# Altium PCB PCB1.PcbDoc
Units mm, origin at the board's own origin, x right, y up, seen from the top; angles counter-clockwise.
Board outline 68.4 x 54.5 mm, 2 copper layers (Top Layer, Bottom Layer), stack 1.1 mm thick; 19 components, 22 nets, 74 pads, 4 vias.
Unrouted connection lines stored in the file: 1.
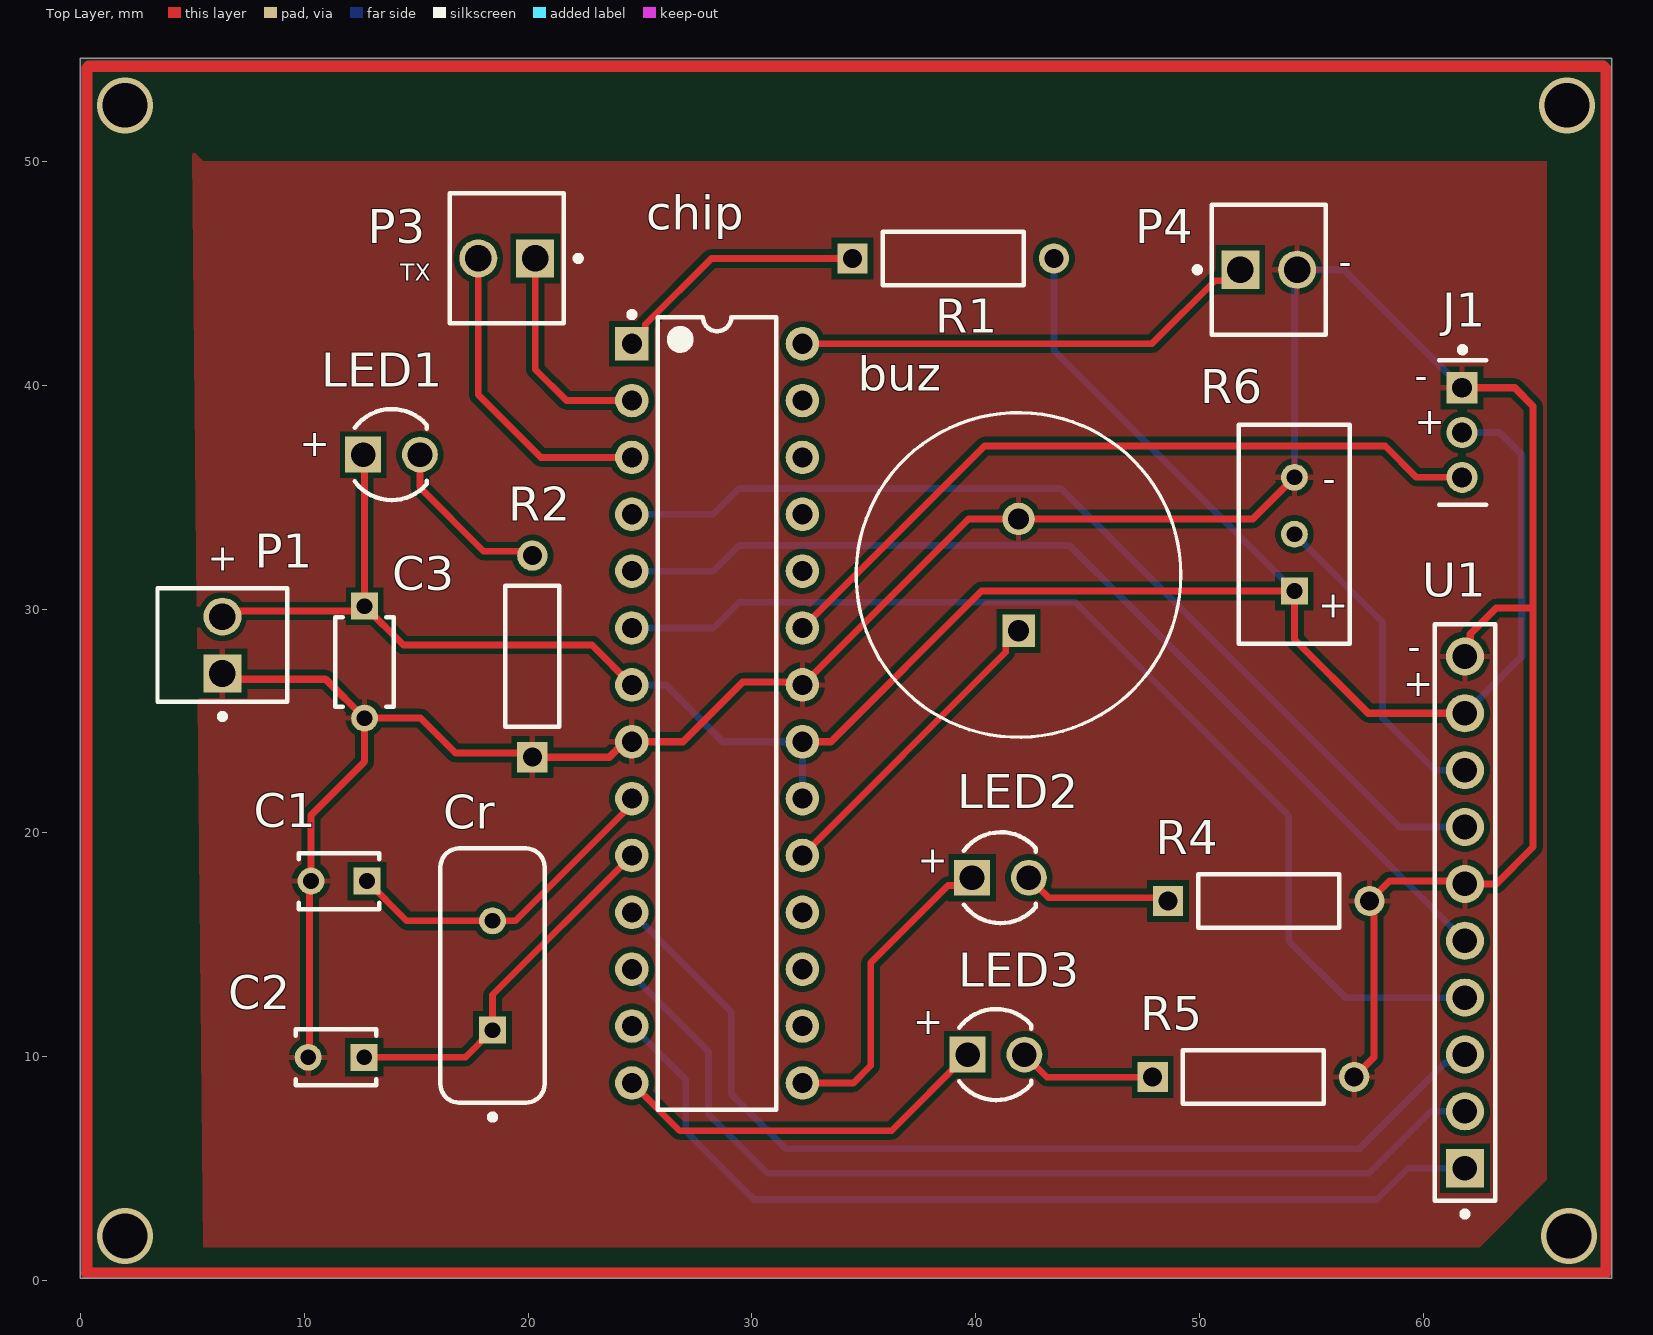
[diagram p0: Top Layer view]
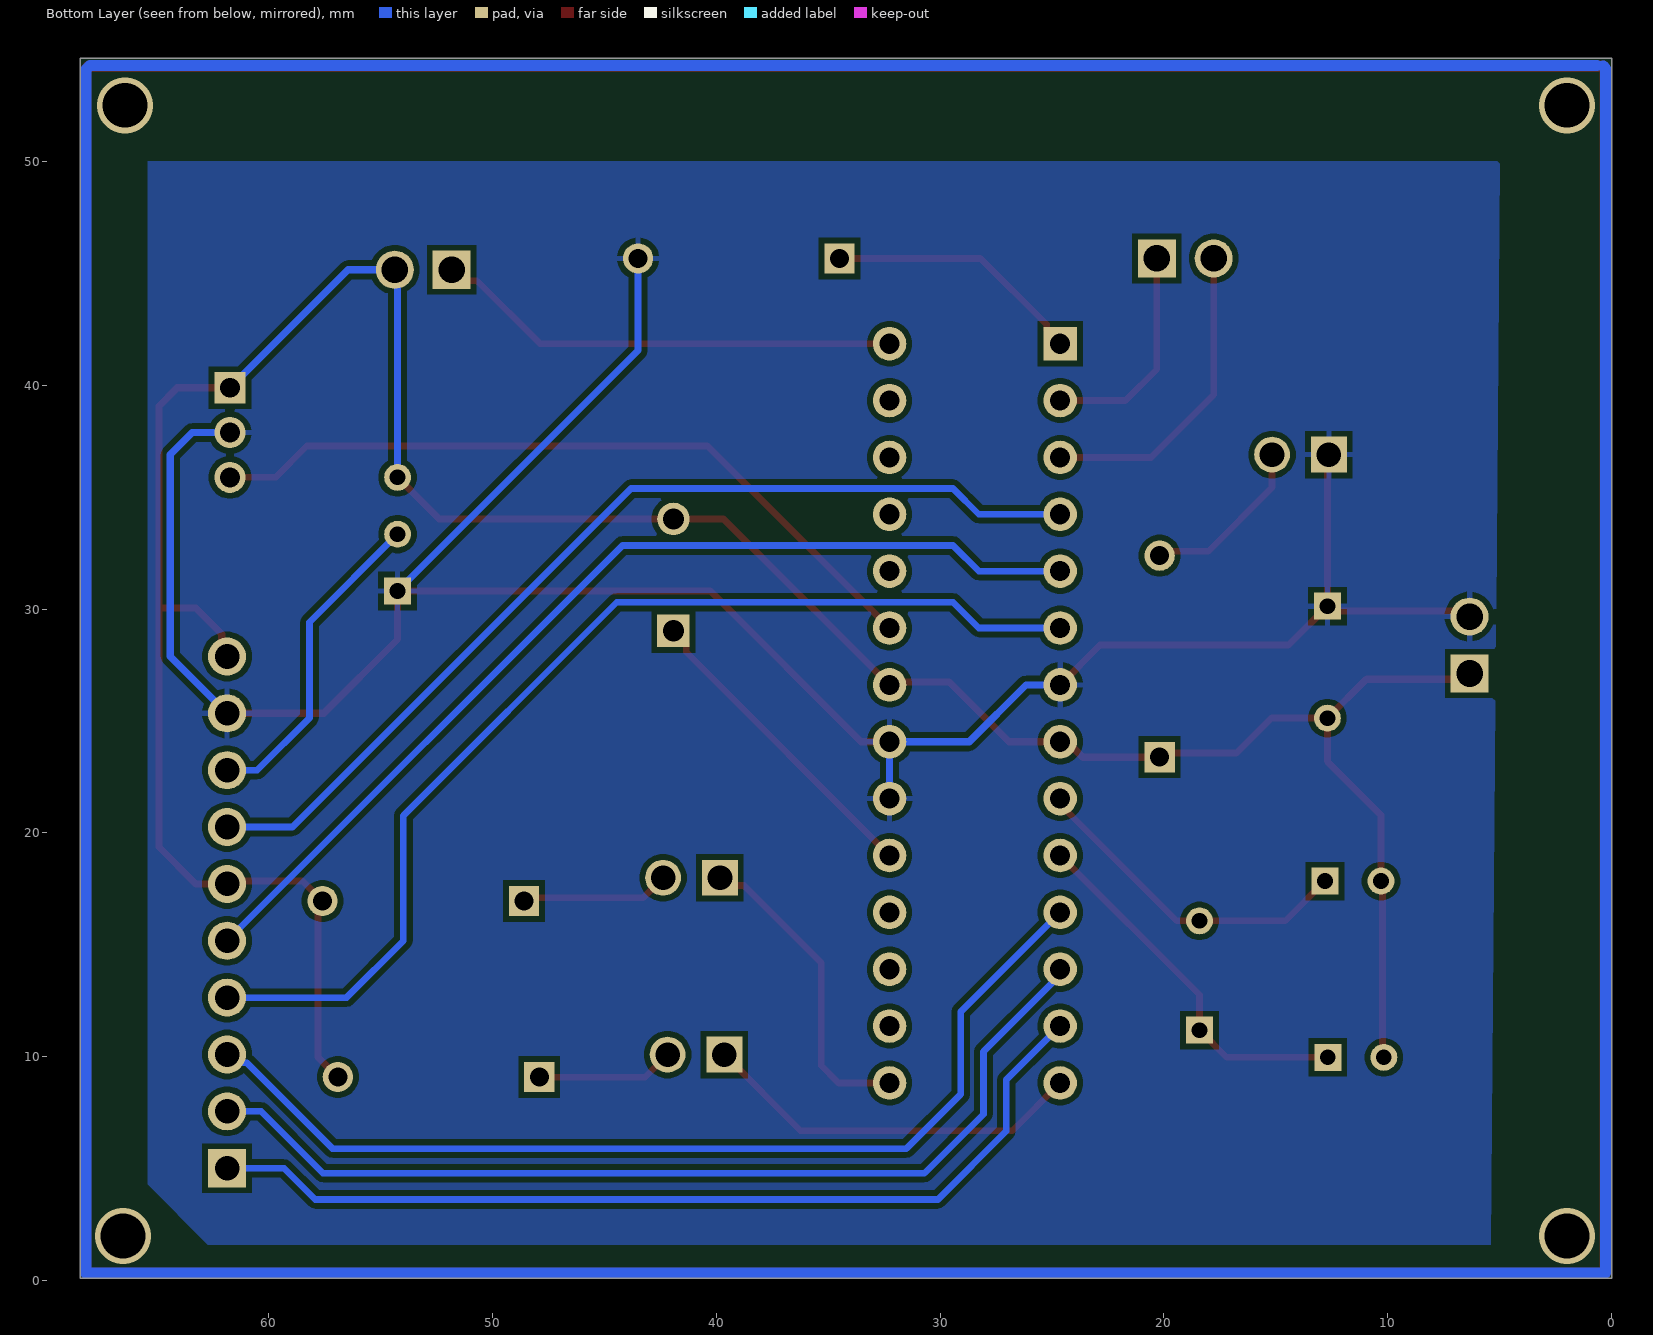
[diagram p1: Bottom Layer view, seen from below]
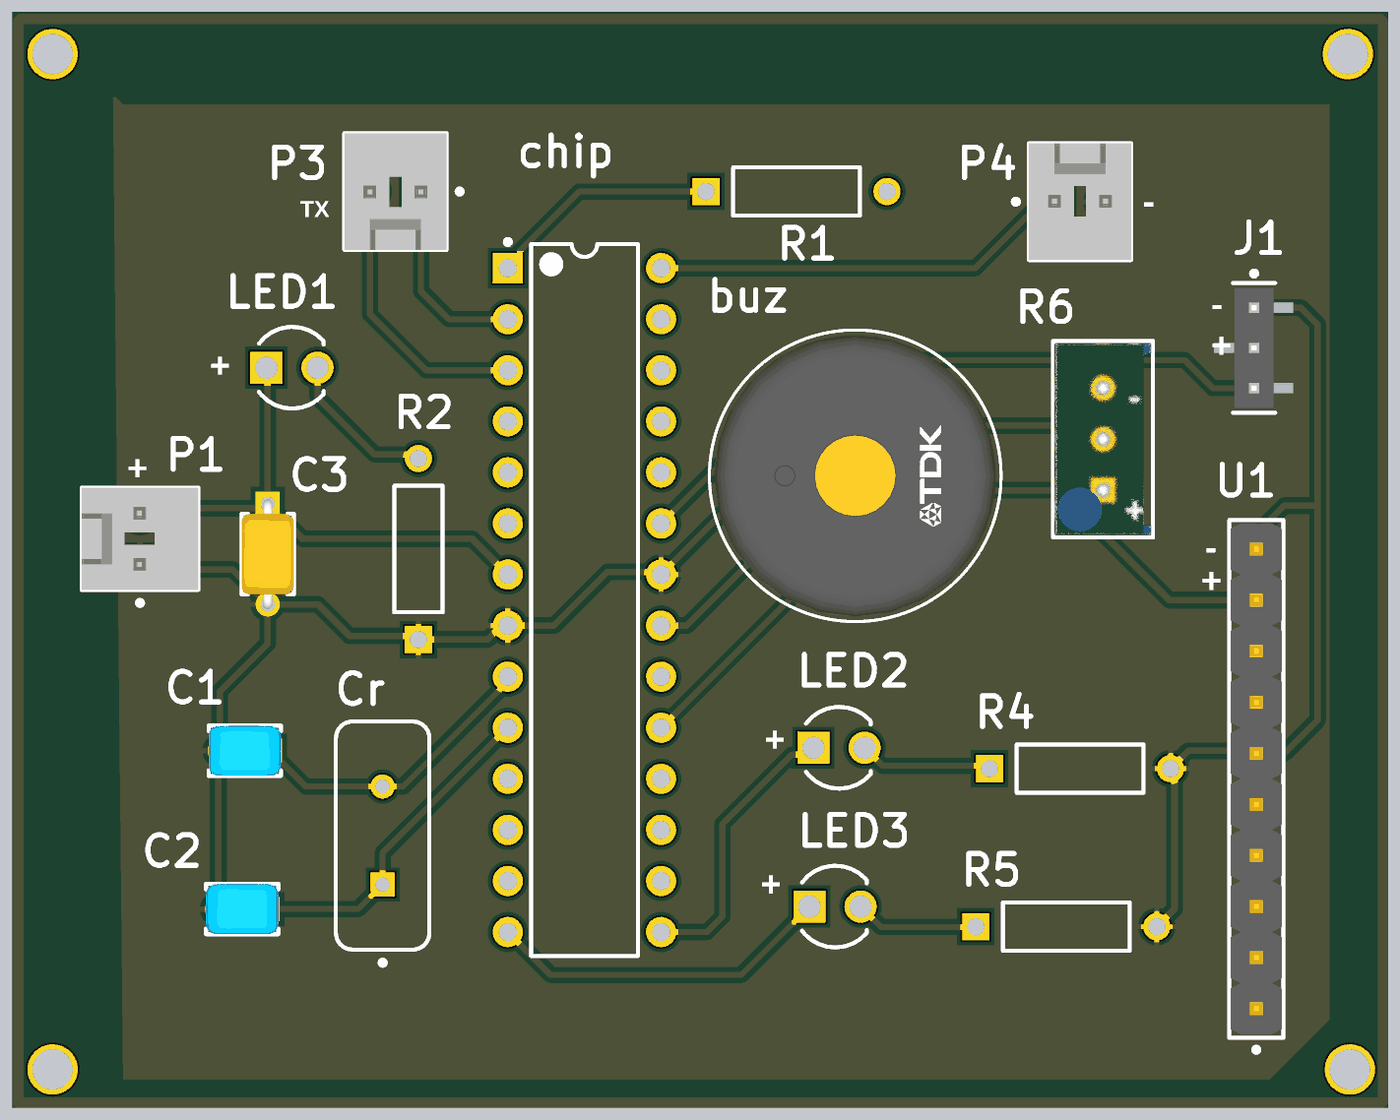
[diagram p2: 3D render of the assembled board from above, using the file's embedded part models]

## Layer stack, top to bottom
Top Solder: solder mask 0.05, SM-001, Dk 4
Top Layer: signal copper 0.1
Dielectric 1: dielectric 0.9, FR-4, Dk 4.8
Bottom Layer: signal copper 0.1
Bottom Solder: solder mask 0.05, SM-001, Dk 4

## Board outline
0,0.1 68.4,0.1 68.4,54.6 0,54.6

## Design rules (kind name [scope] priority, off if disabled: settings)
Clearance [All] p1: gap=0.25 ignorepadtopadclearanceinfootprint=FALSE
PolygonConnect [All] p1: connectstyle=Relief reliefconductorwidth=0.254 reliefentries=4 polygonreliefangle="90 Angle" airgapwidth=0.254
RoutingVias [All] p1: holewidth=0.6 width=0.7 viastyle="Through Hole" minholewidth=0.6 minwidth=0.7 maxholewidth=0.6 maxwidth=0.7
SolderMaskExpansion [All] p1: expansion=0.102 istentingtop=FALSE
Width WidthPWR [(InNet('VCC') OR InNet('GND'))] p1: maxlimit=0.32 minlimit=0.3 preferedwidth=0.32
Width [All] p2: maxlimit=0.5 minlimit=0.254 preferedwidth=0.3
30 further rules are at their usual default settings.

## Components (designator, comment, footprint, x,y, rotation, side; value= is the part's Value field where it differs from the comment)
buz "PS1440P02BT" FP-PS1440P02BT-MFG 41.906,31.527 r90 top
C1 "RCE5C2A220J0DBH03A" FP-RCE0DB-MFG 11.553,17.851 r180 top
C2 "RCE5C2A220J0DBH03A" FP-RCE0DB-MFG 11.426,9.977 r180 top
C3 "K104K15X7RF53H5" FP-K15H5-MFG 12.696,27.63 r270 top
chip "ATmega328P-PU" 28P3 28.444,25.344 r0 top
Cr "FOXSLF/160-20" FOX-FOXSLF160-20 18.411,13.633 r90 top
J1 "TMM-103-03-T-S" FP-TMM-103-03-T-S-MFG 61.738,37.885 r270 top
LED1 "HLMP-1790" LED-2P-2.54-3MM_V 13.9,36.9 r0 top
LED2 "HLMP-1790" LED-2P-2.54-3MM_V 41.1,18 r0 top
LED3 "HLMP-1790" LED-2P-2.54-3MM_V 40.9,10.1 r0 top
P1 "22-27-2021" MOLX-22-27-2021_V 6.346,28.392 r90 top
P3 "22-27-2021" MOLX-22-27-2021_V 19.046,45.664 r180 top
P4 "22-27-2021" MOLX-22-27-2021_V 53.082,45.156 r0 top
R1 "MFR-25FBF5210K" RESA60-630X240 38.985,45.664 r0 top
R2 "MFR-25FBF5210K" RESA60-630X240 20.189,27.884 r90 top
R4 "MFR-25FBF52-1K" RESA60-630X240 53.082,16.962 r0 top
R5 "MFR-25FBF52-1K" RESA60-630X240 52.4,9.1 r0 top
R6 "3296W-1-202LF" FP-3296W-MFG 54.225,33.345 r0 top
U1 "61301011121" FP-61301011121-MFG 61.845,16.454 r90 top

## Footprints (in the part's own frame and the unit in brackets; to place one, negate y for a bottom-side part, rotate by r counter-clockwise, add the part's x,y. Pads: shape width x height; smd on the part's side, far side on the other; paste and mask are expansions set on the pad)
28P3 [mm] "28-Pin Plastic Dual In-Line Package (PDIP)"
  rect 1.5x1.5 hole 0.9: 1(-3.81,16.51)
  round 1.5 hole 0.9: 2(-3.81,13.97) 3(-3.81,11.43) 4(-3.81,8.89) 5(-3.81,6.35) 6(-3.81,3.81) 7(-3.81,1.27) 8(-3.81,-1.27) 9(-3.81,-3.81) 10(-3.81,-6.35) 11(-3.81,-8.89) 12(-3.81,-11.43) 13(-3.81,-13.97) 14(-3.81,-16.51) 15(3.81,-16.51) 16(3.81,-13.97) 17(3.81,-11.43) 18(3.81,-8.89) 19(3.81,-6.35) 20(3.81,-3.81) 21(3.81,-1.27) 22(3.81,1.27) 23(3.81,3.81) 24(3.81,6.35) 25(3.81,8.89) 26(3.81,11.43) 27(3.81,13.97) 28(3.81,16.51)
  silkscreen extent -3.93,-17.7 2.65,17.93, body extent -3.6,-17.65 3.6,17.65, height 4.58
FOX-FOXSLF160-20 [mm] "THD, 2-Leads, Body 11.35x4.65mm"
  rect 1.2x1.2 hole 0.7: 1(-2.44,0)
  round 1.2 hole 0.7: 2(2.44,0)
  silkscreen extent -6.45,-2.33 5.68,2.33, body extent -5.67,-2.32 5.68,2.33, height 3.6
FP-3296W-MFG [mm]
  rect 1.2x1.2 hole 0.7 paste-1000 mask+0: 1(0.005,-2.54)
  round 1.2 hole 0.7 paste-1000 mask+0: 2(0.005,0) 3(0.005,2.54)
  silkscreen extent -2.48,-4.89 2.48,4.89, body extent -2.58,-4.99 2.58,4.99, height 0.25
FP-61301011121-MFG [mm]
  rect 1.7x1.7 hole 1.1 paste-1000 mask+0: 1(-11.43,0)
  round 1.7 hole 1.1 paste-1000 mask+0: 2(-8.89,0) 3(-6.35,0) 4(-3.81,0) 5(-1.27,0) 6(1.27,0) 7(3.81,0) 8(6.35,0) 9(8.89,0) 10(11.43,0)
  silkscreen extent -13.6,-1.34 12.88,1.34, body extent -12.98,-1.45 12.98,1.45, height 0.25
FP-K15H5-MFG [mm]
  rect 1.2x1.2 hole 0.7 paste-1000 mask+0: 1(-2.5,0)
  round 1.2 hole 0.7 paste-1000 mask+0: 2(2.5,0)
  silkscreen extent -2,-1.3 2,1.3, body extent -3.2,-1.4 3.2,1.4, height 0.25
FP-PS1440P02BT-MFG [mm]
  rect 1.45x1.45 hole 0.95 paste-1000 mask+0: 1(-2.5,0)
  round 1.45 hole 0.95 paste-1000 mask+0: 2(2.5,0)
  silkscreen extent -7.25,-7.25 7.25,7.25, body extent -7.35,-7.35 7.35,7.35, height 0.25
FP-RCE0DB-MFG [mm]
  rect 1.2x1.2 hole 0.7 paste-1000 mask+0: 1(-1.25,0)
  round 1.2 hole 0.7 paste-1000 mask+0: 2(1.25,0)
  silkscreen extent -1.8,-1.25 1.8,1.25, body extent -1.95,-1.35 1.95,1.35, height 0.25
FP-TMM-103-03-T-S-MFG [mm]
  rect 1.39x1.39 hole 0.89 paste-1000 mask+0: 1(-2,-0.02)
  round 1.39 hole 0.89 paste-1000 mask+0: 2(0,-0.02) 3(2,-0.02)
  silkscreen extent -3.82,-1.05 3.22,1.05, body extent -3.1,-2.07 3.1,2.07, height 0.25
LED-2P-2.54-3MM_V [mm] "LED, 2-Leads, Dia 3mm, Pitch 2.54mm"
  rect 1.6x1.6 hole 1.1: 1(-1.27,0)
  round 1.6 hole 1.1: 2(1.27,0)
  silkscreen extent -1.64,-2.03 1.57,2.03, body extent -2.06,-2.07 1.6,2.07, height 6.35
MOLX-22-27-2021_V [mm] "Header, 2-Leads, Body 5.8x5.08mm"
  rect 1.7x1.7 hole 1.19: 1(-1.27,0)
  round 1.7 hole 1.19: 2(1.27,0)
  silkscreen extent -3.31,-2.9 2.54,2.9, body extent -2.54,-2.9 2.54,2.9, height 11.72
RESA60-630X240 [mm] "Axial Resistor, 2-Leads, Dia 2.4mm, Body Length 6.3mm"
  rect 1.35x1.35 hole 0.85: 1(-4.5,0)
  round 1.35 hole 0.85: 2(4.5,0)
  silkscreen extent -3.15,-1.2 3.15,1.2, body extent -3.15,-1.2 3.15,1.2, height 2.4

## Part data
buz: library part CMP-08413-000003-1, "AUDIO PIEZO TRANSDUCER 30V TH", Frequency=4kHz, Max Operating Temperature=70°C, Min Operating Temperature=-10°C, Operating Supply Voltage=3V, Package Quantity=350, Diameter=14mm, Height=8mm, Lead Free="Lead Free", Mount="Through Hole", Number of Terminals/Pins=2, Packaging="Tape and Reel", RoHS Compliant=Yes, Self Resonant Frequency=4kHz, Termination="PC Pins", Voltage Rating (DC)=3V, Washable=No
C1 C2: library part CMP-06035-047347-1, "Cap Ceramic 22pF 100V C0G ±5% Radial 2.5mm +125°C Ammo Pack", Capacitance=22pF, Case/Package=Radial, Dielectric=C0G, Max Operating Temperature=125°C, Min Operating Temperature=-55°C, Package Quantity=2000, Ratings=AEC-Q200, Resistor Type=Ceramic, Tolerance=5%, Voltage=100V, Depth=2.5mm, Height=3.5mm, Height - Seated (Max)=0.138inch, Lead Diameter=0.5mm, Lead Pitch=0.098inch, Lead/Base Style=Straight, Length=3.6mm, Mount="Through Hole", Packaging="Tape and Reel", Termination=Radial, Voltage Rating=100V, Voltage Rating (DC)=100V, Width=0.098inch
C3: library part CMP-02417-000048-1, "CAP CER 0.1UF 50V X7R RADIAL", Capacitance=100nF, Case/Package=Dipped, Dielectric=X7R, Max Operating Temperature=125°C, Min Operating Temperature=-55°C, Package Quantity=5000, Tolerance=10%, Voltage=50V, Construction=RADIAL, Depth=2.5mm, Diameter=500um, Height=4mm, Height - Seated (Max)=0.1inch, Lead Diameter=0.5mm, Lead Length=30mm, Lead Pitch=5mm, Lead/Base Style="Formed Leads", Length=4mm, Mount="Through Hole", Packaging=Bulk, Radiation Hardening=No, RoHS Compliant=Yes, Series=K, Termination=Radial, Thickness=2.6mm, Voltage Rating=50V, Voltage Rating (DC)=50V, Weight=0.005644oz, Width=2.5mm
chip: library part CMP-0095-00013-2, "8-bit AVR Microcontroller, 32KB Flash, 1KB EEPROM, 2KB SRAM, 28-pin PDIP, Industrial Grade (-40°C to 85°C)", ComponentLink1Description="Manufacturer URL", ComponentLink1URL=http://www.atmel.com/, ComponentLink2Description="ATmega48A/48PA/88A/88PA/168A/168PA/328/328P Datasheet", ComponentLink2URL=http://www.atmel.com/dyn/resources/prod_documents/8271.pdf, ComponentLink3Description="ATmega48A/48PA/88A/88PA/168A/168PA/328/328P Summary", ComponentLink3URL=http://www.atmel.com/dyn/resources/prod_documents/8271S.pdf, DatasheetVersion="revD, May-2011", PackageDescription="28-lead (0.300\"/7.62mm Wide) Plastic Dual Inline Package (PDIP)", PackageReference=28P3, PackageVersion="revB, Sep-2001", RevisionNote="DatasheetVersion updated. URLs added."
Cr: library part CMP-1749-00003-1, "Resistance Weld Thru-Hole Crystal, 16 MHz, -20 to 70 degC, 2-Pin THD, RoHS, Bulk", Case\Package=Axial, Max Operating Temperature="155 degC", Min Operating Temperature="-55 degC", Package Quantity=200, Power Rating="250 mW", Resistance="221 kohm", Tolerance=1%, Voltage Rating="250 V", ComponentLink1Description="Manufacturer URL", ComponentLink1URL=http://www.foxonline.com/, ComponentLink2Description=Datasheet, ComponentLink2URL=http://www.foxonline.com/pdfs/hc49slf.pdf, DatasheetVersion=Mar-15, Length="0.248 inch", Mount="Through Hole", PackageDescription="2-Pin Through Hole Device, Body 11.35 x 4.65 mm", PackageReference=FOXSLF160-20, Packaging=Bulk, RoHSCompliant=true
J1: library part CMP-02766-001695-1, "CONN HEADER VERT 3POS 2MM", Color=Black, Max Current Rating=3.9A, Max Operating Temperature=105°C, Max Voltage Rating (AC)=500V, Min Operating Temperature=-55°C, Package Quantity=1, Connector Type=Header, Contact Finish - Mating=TIN, Contact material=Bronze, Contact Mating Length=0.157inch, Contact Plating=Tin, Contact Shape=Square, Contact Type="Male Pin", Depth=1.97mm, Fastening Type=Pull, Gender=Male, Housing Color=Black, Housing material=Polymer, Insulation Color=Black, Insulation Material=Polymer, Lead Free="Lead Free", Length=6mm, Mount="Through Hole", Number of Contacts=3, Number of Positions=3, Number of Rows=1, Orientation=Straight, Packaging=Bulk, Pitch=2mm, Radiation Hardening=No, REACH SVHC="No SVHC", RoHS Compliant=Yes, Series=TMM, Termination=Solder
LED1 LED2 LED3: library part CMP-2000-05186-1, "LED, Green, 2 mA, 1.9 V, -20 to 100 degC, 2-Pin THD, RoHS, Bulk", Color=Green, Dominant Wavelength/Color Temperature=569nm, Manufacturer=Avago, Package=2T-1, Category=LEDs, Datasheet URL=https://datasheet.ciiva.com/11773/0900766b800204ad-11773539.pdf, Datasheet Version=Jul-14, Intensity=2.3mcd, Lens Appearance=ColoredDiffused, Lens Shape Type=Circular, Manufacturer URL=http://www.avagotech.com/, Mounting=ThroughHole, Mounting Orientation=TopMount, Number of LEDs=1, Packaging=Bulk, Peak Wavelength=565nm, Pin Count=2, Rad Hard=No, Type=Uni-Color, Viewing Angle=50deg
P1 P3 P4: library part CMP-2000-05537-1, "Male Header, Pitch 2.54 mm, 1 x 2 Position, Height 11.7 mm, Tail Length 3.56 mm, 0 to 75 degC, RoHS, Bulk", Current - Max=4A, Manufacturer=Molex, Operating temperature=0°Cto+75°C, Package Description="2-Leads Header, Body 5.08 x 5.8 mm, Pitch 2.54 mm", Package Version="Rev. BC, 02/2012", PartNumber=0022272021, Voltage - Max=250V, Contact material=Tinplatedbrass, Current rating=4A, Datasheet URL=http://www.molex.com/pdm_docs/sd/022272021_sd.pdf, Datasheet Version="Rev. F, 06/2009", Housing material=Nylon(UL94V-0), Manufacturer URL=http://www.molex.com/, Mounting Technology=ThroughHole, No. of Positions=2, No. of Rows=1, Orientation=Vertical, Package Reference=22-27-2021, Pitch=2.54mm, Voltage Rating=250V
R1 R2: library part CMP-1659-00074-2, "Axial Resistor, 10 KOhm, +/- 1%, 0.25 W, -55 to 155 degC, 2-Pin THD, RoHS, Bulk", Case\/Package=Axial, Manufacturer=Yageo, Max Operating Temperature=155degC, Max Power Dissipation=250mW, Min Operating Temperature=-55degC, Package Description="2-Pin Axial Lead, Dia 2.4 mm, Body Length 6.3 mm", Package Quantity=200, Package Reference=MFR-25, Resistance=10KOhm, Temperature Coefficient=100ppm\/degreesC, Tolerance=1%, Voltage Rating=250V, Voltage Rating (DC)=200V, Composition=MetalFilm, Datasheet URL=http://www.yageo.com/documents/recent/Yageo%20LR_MFR_2013.pdf, Datasheet Version=04/2013, Lead Free=LeadFree, Length=0.248inch, Manufacturer URL=http://www.yageo.com/, Military Standard=Not, Mount=ThroughHole, Mounting Technology=ThroughHole, Number of Terminations=2, Packaging=Bulk, Power Rating=250mW, RoHSCompliant=True, Termination=Axial
R4 R5: library part CMP-1659-00075-1, "Axial Resistor, 1 KOhm, +/- 1%, 250 mW, -55 to 155 degC, 2-Pin THD, RoHS, Bulk", Case\Package=Axial, Max Operating Temperature="155 degC", Min Operating Temperature="-55 degC", Package Quantity=200, Power Rating="250 mW", Resistance="100 ohm", Tolerance=1%, Voltage Rating="250 V", ComponentLink1Description="Manufacturer URL", ComponentLink1URL=http://www.yageo.com/, ComponentLink2Description=Datasheet, ComponentLink2URL=http://www.yageo.com/documents/recent/Yageo%20LR_MFR_2013.pdf, DatasheetVersion=Apr-13, Length="0.248 inch", PackageDescription="2-Pin Axial Lead, Dia 2.4 mm, Body Length 6.3 mm", PackageReference=MFR-25, Packaging=Bulk, RoHSCompliant=true
R6: library part CMP-2000-05582-2, "TRIMMER 2K OHM 0.5W PC PIN TOP", Color=Blue, Max Operating Temperature=125°C, Max Power Dissipation=500mW, Min Operating Temperature=-55°C, Package Quantity=50, Resistance=2kR, Resistance Tolerance=10%, Resistor Type=Cermet, Temperature Coefficient=100ppm/°C, Contact Plating=Tin, Depth=4.83mm, Height=0.395inch, Lead Free="Lead Free", Length=9.53mm, Military Standard=Not, Mount=Panel, Number of Turns=25, Packaging=Rail/Tube, Power Rating=500mW, Radiation Hardening=No, REACH SVHC="No SVHC", RoHS Compliant=Yes, Series=3296, Taper=Linear, Technology=CERMET, Termination=Pin, Tolerance=10%, Weight=0.03oz, Width=9.53mm
U1: library part CMP-1502-01082-3, "CONN HEADER VERT 10POS 2.54MM", Color=Black, Current rating=3A, Flammability Rating="UL94 V-0", Insulation Resistance=1GR, Max Operating Temperature=105°C, Min Operating Temperature=-40°C, Package Quantity=1000, Voltage Rating=250V, Connector Type=Header, Contact Finish - Mating=GOLD, Contact Gender=Male, Contact material="Copper Alloy", Contact Mating Length=0.236inch, Contact Plating=Gold, Contact Shape=Square, Contact Type="Male Pin", Fastening Type=Pull, Gender=Male, Height=11.54mm, Housing material=PBT, Insulation Color=Black, Insulation Material=Nylon, Length=2.54mm, Mount="Through Hole", Number of Contacts=10, Number of Positions=10, Number of Rows=1, Orientation=Straight, Packaging=Bulk, Pitch=2.54mm, RoHS Compliant=Yes, Series=WR-PHD, Termination=Solder, Width=25.4mm

## Via types
v1: diameter 2.5, hole 2, Top Layer to Bottom Layer, 4 vias

## Nets (pads, with @x,y where several pads share a name; then routed paths per layer and width w, separated by ;. In a path a pad name is that pad's centre, name@x,y a point inside that pad or via, vN(x,y) a via of type N, cw(c..) or ccw(c..) an arc to the next point about the centre after c; other vN are vias at no path point)
GND: buz.2 C1.2 C2.2 C3.2 chip.8 chip.22 J1.1 P1.1 P4.2 R2.1 R4.2 R5.2 R6.3 U1.6 U1.10 | length 134.5
  Top Layer w0.32: P1.1 6.6,26.868 10.958,26.868 C3.2 ; C2.2 10.24,10.041 10.24,17.788 C1.2 10.303,20.792 12.696,23.185 C3.2 ; R6.3 52.372,34.027 buz.2 39.667,34.027 chip.22 32.127,26.741 29.587,26.741 26.92,24.074 chip.8 24.315,24.074 23.625,23.384 R2.1 20.007,23.566 16.76,23.566 15.196,25.13 C3.2 ; P4.2@54.352,44.792 P4.2 ; R5.2 57.781,9.981 57.781,16.484 57.582,16.683 R4.2 58.471,17.851 61.718,17.851 U1.6 63.242,17.724 64.893,19.375 64.893,30.043 ; J1.1 64.068,39.885 64.893,39.06 64.893,30.043 ; U1.10 62.084,28.123 62.084,28.885 63.242,30.043 64.893,30.043
  Bottom Layer w0.32: R6.3 54.23,45.034 P4.2 56.447,45.156 J1.1
Netbuz_1: buz.1 chip.19 | length 14
  Top Layer w0.3: chip.19 41.331,28.071 41.331,28.452 buz.1
NetC1_1: C1.1 chip.9 Cr.2 | length 15
  Top Layer w0.3: C1.1 14.581,16.073 19.427,16.073 24.634,21.28 chip.9
NetC2_1: C2.1 chip.10 Cr.1 | length 16.6
  Top Layer w0.3: C2.1 17.195,9.977 Cr.1 18.411,12.771 chip.10
Netchip_1: chip.1 R1.1 | length 11.6
  Top Layer w0.3: chip.1 25.234,42.454 25.234,42.708 28.19,45.664 R1.1
Netchip_2: chip.2 P3.1 | length 9.8
  Top Layer w0.3: P3.1 20.316,40.711 21.713,39.314 chip.2
Netchip_3: chip.3 P3.2 | length 14.1
  Top Layer w0.3: P3.2 17.776,39.568 20.57,36.774 chip.3
Netchip_4: chip.4 U1.7 | length 44
  Bottom Layer w0.3: chip.4 28.27,34.234 29.42,35.384 43.804,35.384 58.924,20.264 U1.7
Netchip_5: chip.5 U1.5 | length 45
  Bottom Layer w0.3: chip.5 28.27,31.694 29.42,32.844 44.185,32.844 U1.5
Netchip_6: chip.6 U1.4 | length 48.3
  Bottom Layer w0.3: chip.6 28.27,29.154 29.42,30.304 44.439,30.304 44.572,30.171 53.971,20.772 53.971,15.184 56.511,12.644 U1.4
Netchip_11: chip.11 U1.3 | length 45.5
  Bottom Layer w0.3: chip.11 29.079,12.009 29.079,8.326 31.505,5.9 57.133,5.9 60.972,9.739 61.101,9.739 61.466,10.104 U1.3
Netchip_12: chip.12 U1.2 | length 43.9
  Bottom Layer w0.3: chip.12 24.634,13.66 28.063,10.231 28.063,7.437 30.7,4.8 57.557,4.8 60.321,7.564 U1.2
Netchip_13: chip.13 U1.1 | length 42.3
  Bottom Layer w0.3: chip.13 27.047,8.961 27.047,6.675 30.095,3.627 57.908,3.627 59.305,5.024 U1.1
Netchip_14: chip.14 LED3.1 | length 17.3
  Top Layer w0.3: chip.14 26.768,6.7 36.23,6.7 LED3.1
Netchip_15: chip.15 LED2.1 | length 14.1
  Top Layer w0.3: chip.15 34.534,8.834 35.3,9.6 35.3,14.2 38.756,17.656 39.486,17.656 LED2.1
Netchip_23: chip.23 J1.3 | length 33.4
  Top Layer w0.3: chip.23 40.382,37.282 58.289,37.282 59.686,35.885 J1.3
Netchip_28: chip.28 P4.1 | length 20.9
  Top Layer w0.3: chip.28 47.875,41.854 50.688,44.667 51.323,44.667 P4.1
NetLED1_2: LED1.2 R2.2 | length 7.8
  Top Layer w0.3: LED1.2 15.17,35.43 18.015,32.585 19.988,32.585 R2.2
NetLED2_2: LED2.2 R4.1 | length 6.6
  Top Layer w0.3: LED2.2 43.27,17.1 48.444,17.1 R4.1
NetLED3_2: LED3.2 R5.1 | length 6.1
  Top Layer w0.3: LED3.2 43.181,9.089 R5.1@47.889,9.089
NetR6_2: R6.2 U1.8 | length 14.5
  Bottom Layer w0.3: R6.2 58.162,29.413 58.162,25.139 60.497,22.804 U1.8
VCC: C3.1 chip.7 chip.20 chip.21 J1.2 LED1.1 P1.2 R1.2 R6.1 U1.9 | length 109.1
  Top Layer w0.32: P1.2 6.6,29.916 12.482,29.916 C3.1 ; LED1.1 12.38,36.65 12.696,36.334 C3.1 ; chip.7 22.856,28.392 14.434,28.392 C3.1 ; chip.21 33.524,24.074 40.255,30.805 R6.1 54.23,28.641 57.527,25.344 U1.9
  Bottom Layer w0.32: chip.7 26.158,26.614 28.698,24.074 chip.21 chip.20 ; R1.2 43.485,41.55 R6.1 ; J1.2 63.401,37.885 64.385,36.901 64.385,27.884 U1.9
pads on no net: chip.16 chip.17 chip.18 chip.24 chip.25 chip.26 chip.27
copper on no net: | length 486.5
  Top Layer w0.5: 0.3,54.175 0.3,0.375 0.275,0.35 68.125,0.35 68.15,0.375 68.15,54.125 68.025,54.25 0.375,54.25
  Bottom Layer w0.5: 0.375,54.25 0.275,54.15 0.275,0.35 68.125,0.35 68.15,0.325 68.15,54.1 67.975,54.275 0.65,54.275
  other v1: 2,2 66.5,2 2,52.5 66.4,52.5

## Polygon pours and split planes (outlines as drawn)
VCC on Bottom Layer "VCC_L02_P001" (solid, remove dead copper, pour order 1): 5,49.9 5.1,50 65.4,50 65.4,4.3 62.7,1.6 5.4,1.6
GND on Top Layer "GND_L01_P000" (solid, remove dead copper, pour order 0): 5,50.5 5.5,50 65.5,50 65.5,4.5 62.5,1.5 5.5,1.5

## Silkscreen, mask and mechanical layers (free items; w line width, h text height)
Top Overlay:
  text "-" at 56.2,44.557 h2
  text "TX" at 14.3,44.4 h1.3
  text "-" at 59.6,39.457 h2
  text "+" at 59.6,37.415 h2
  text "+" at 9.8,36.415 h2
  text "-" at 55.5,34.857 h2
  text "+" at 5.7,31.315 h2
  text "+" at 55.3,29.215 h2
  text "-" at 59.3,27.357 h2
  text "+" at 59.1,25.715 h2
  text "+" at 37.4,17.815 h2
  text "+" at 37.2,10.615 h2